# Altium PCB Protolink USB V1.PcbDoc
Units mil, origin at the board's own origin, x right, y up, seen from the top; angles counter-clockwise.
Board outline 1437.01 x 649.61 mil, 2 copper layers (Top Layer, Bottom Layer), stack 65.792 mil thick; 18 components, 19 nets, 72 pads, 2 vias.
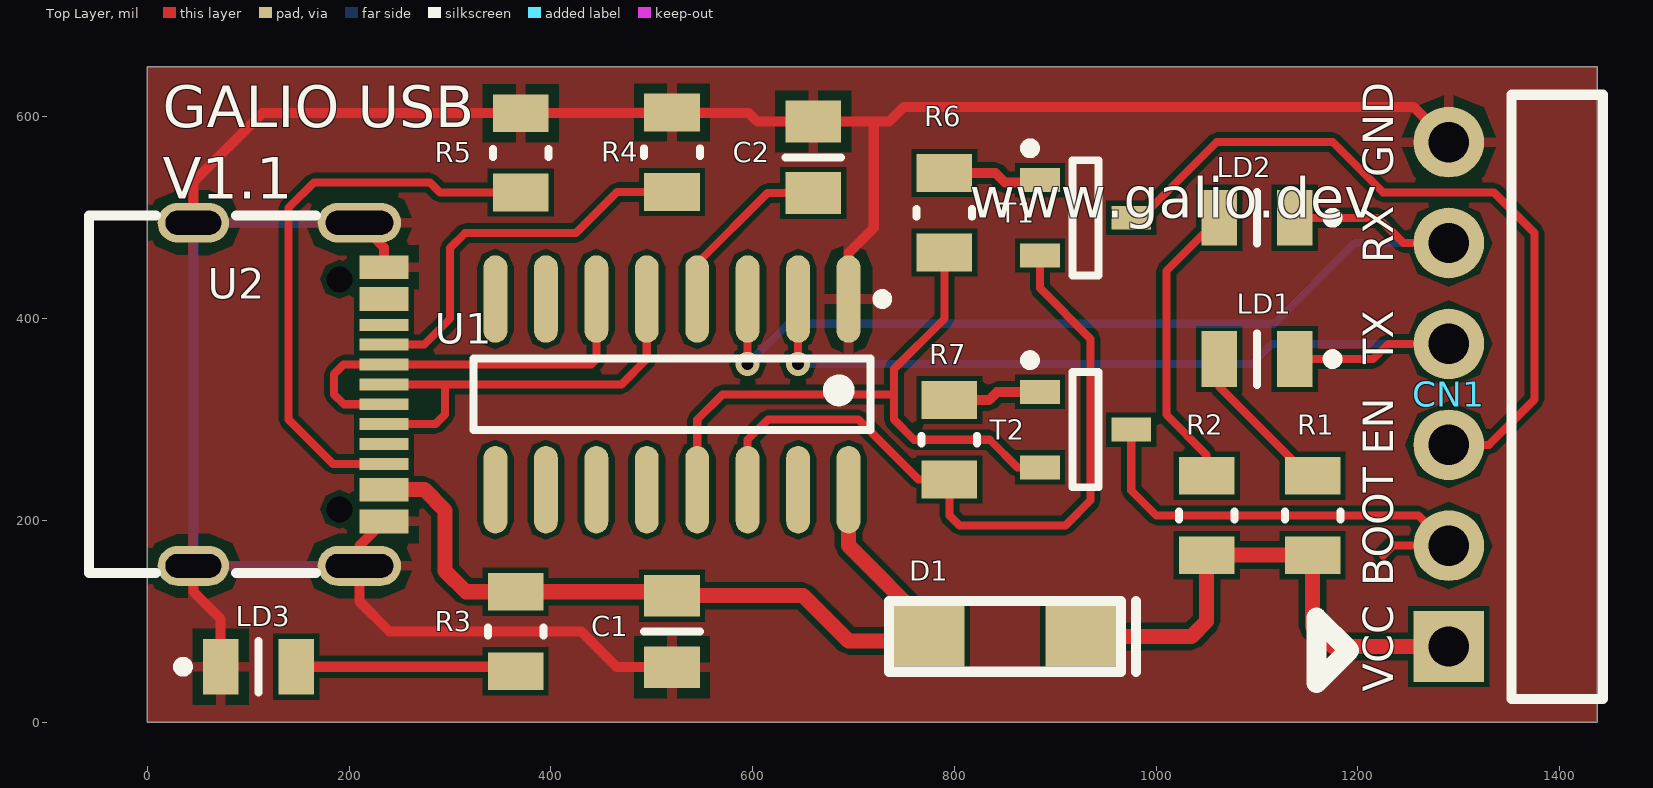
[diagram p0: Top Layer view]
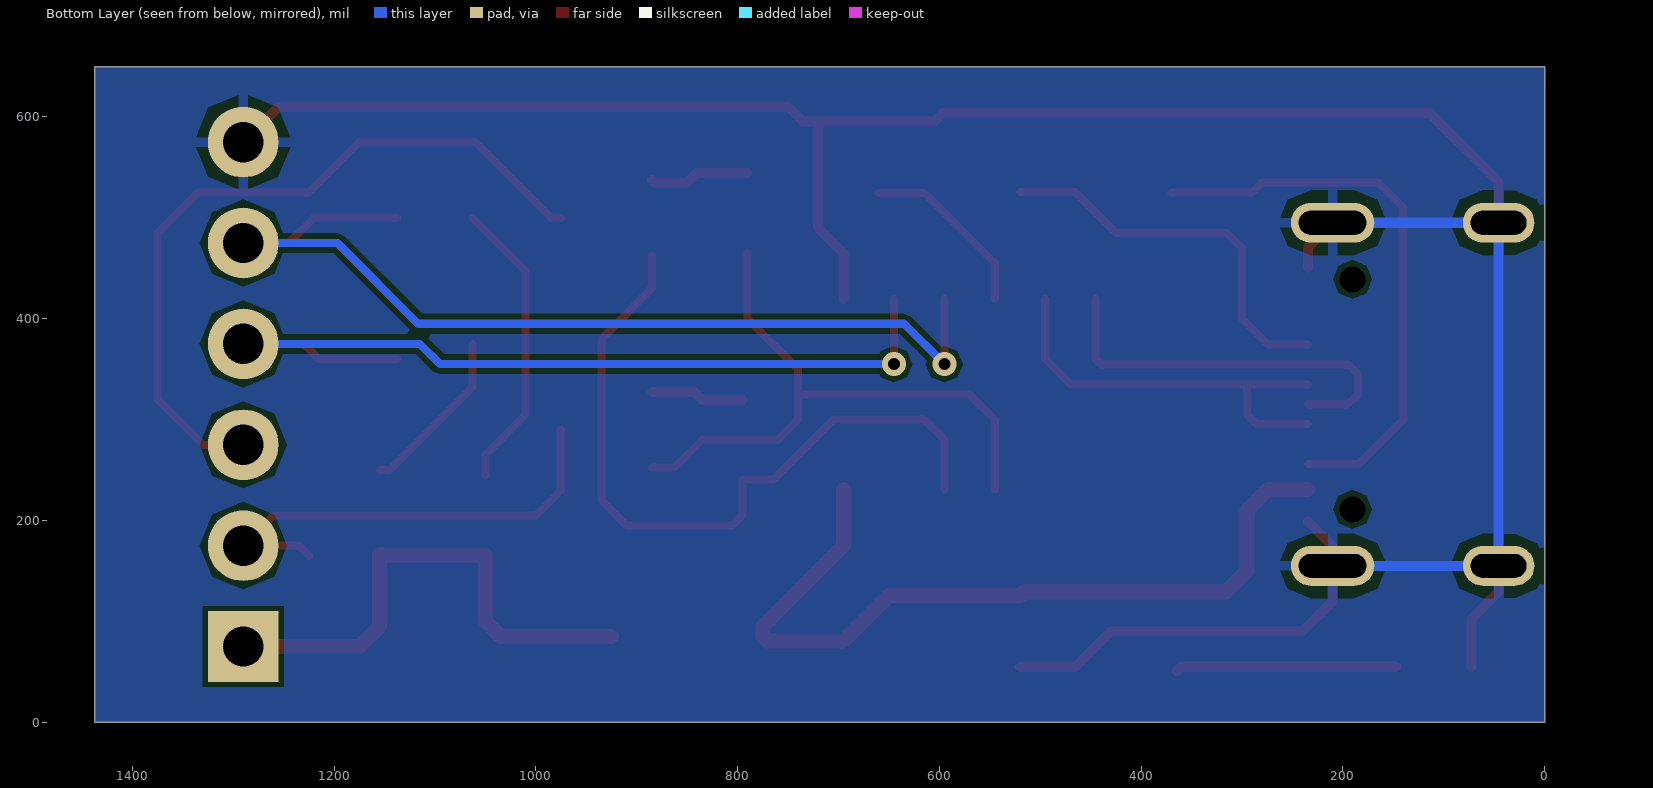
[diagram p1: Bottom Layer view, seen from below]
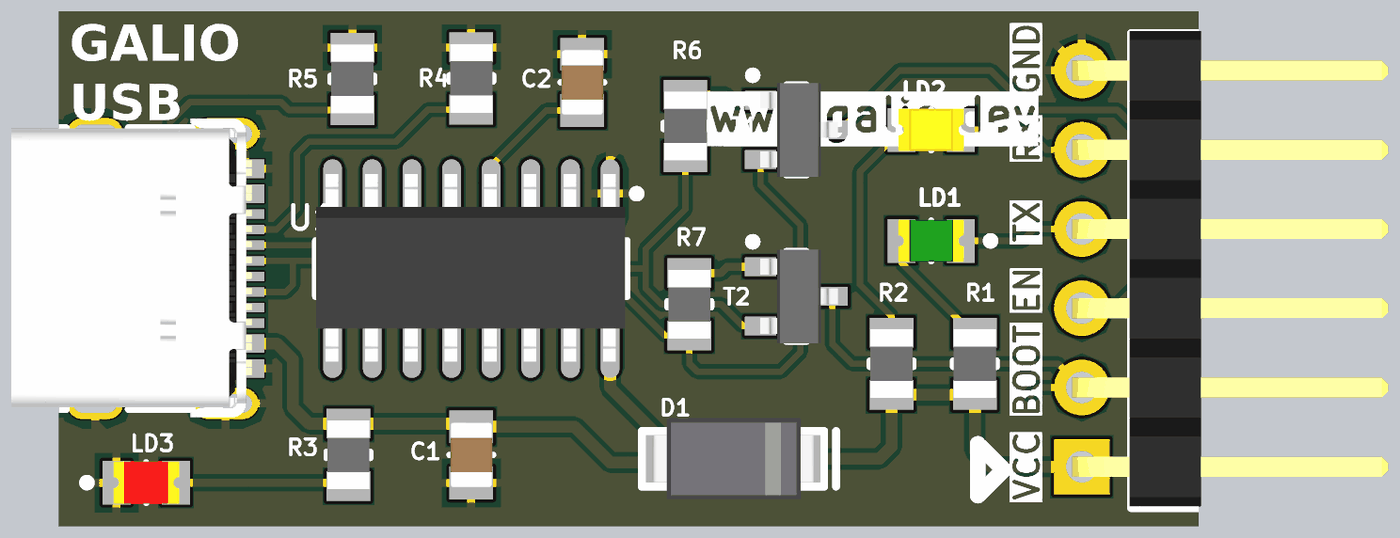
[diagram p2: 3D render of the assembled board from above, using the file's embedded part models]

## Layer stack, top to bottom
Top Solder: solder mask 0.4, Solder Resist, Dk 3.5
Top Layer: signal copper 1.4
Dielectric 1: dielectric 62.9921, FR-4, Dk 4.8
Bottom Layer: signal copper 1.4
Bottom Solder: solder mask 0.4, Solder Resist, Dk 3.5

## Board outline
0,0 0,649.61 1437.01,649.61 1437.01,0

## Design rules (kind name [scope] priority, off if disabled: settings)
Clearance [All] p1: gap=5 ignorepadtopadclearanceinfootprint=FALSE
PolygonConnect [All] p1: connectstyle=Relief reliefconductorwidth=10 reliefentries=4 polygonreliefangle="90 Angle" airgapwidth=10
RoutingVias [All] p1: holewidth=11.81 width=23.62 viastyle="Through Hole" minholewidth=11.81 minwidth=23.62 maxholewidth=11.81 maxwidth=23.62
SolderMaskExpansion [All] p1: expansion=4 istentingtop=FALSE
Width [All] p1: maxlimit=15 minlimit=7 preferedwidth=8 minimp=50.000000 maximp=50.000000 favimp=50.000000
30 further rules are at their usual default settings.

## Components (designator, comment, footprint, x,y, rotation, side; value= is the part's Value field where it differs from the comment)
C1 "100nF" CAPC2012X135N 520,90 r90 top
C2 "100nF" CAPC2012X135N 660,560 r270 top
CN1 "CON6" PIN6_RIGHT_ANGLE 1290,75 r180 top
D1 "DIODO" DIODE_SMA 775,85 r0 top
LD1 "Green" LED_OSRAM_LGR971 1100,360 r180 top
LD2 "Yellow" LED_OSRAM_LYR976 1100,500 r180 top
LD3 "Super Red" LED_OSRAM_LSR976 110,55 r0 top
R1 "1k" RESC2012X60N 1155,205 r90 top
R2 "1k" RESC2012X60N 1050,205 r90 top
R3 "1k" RESC2012X60N 365,90 r270 top
R4 "20k" RESC2012X60N 520,565 r270 top
R5 "20k" RESC2012X60N 370,564.37 r270 top
R6 "10k" RESC2012X60N 790,505 r90 top
R7 "10k" RESC2012X60N 795,280 r90 top
T1 "MMBT3904" SOT95P230X110-3N 930,500 r0 top
T2 "MMBT3904" SOT95P230X110-3N 930,290 r0 top
U1 "CH340C" SOIC-16_N 520,325 r270 top
U2 "GT-USB-7010ASV" USB-C-SMD_G-SWITCH_GT-USB-7010ASV 140,325 r270 top

## Footprints (in the part's own frame and the unit in brackets; to place one, negate y for a bottom-side part, rotate by r counter-clockwise, add the part's x,y. Pads: shape width x height; smd on the part's side, far side on the other; paste and mask are expansions set on the pad)
CAPC2012X135N [mm] "Chip Capacitor, Body 2.0x1.25mm, IPC Medium Density"
  rect 1.05x1.4 smd: 1(-0.9,0) 2(0.9,0)
  silkscreen extent 0,-0.7 0,0.7, body extent -1.05,-0.67 1.05,0.68, height 1.25
DIODE_SMA [mil]
  rect 70x60 smd: 1(150,0) 2(0,0)
  silkscreen extent -40,-35 205,35, body extent -26,-51 178,51, height 95
LED_OSRAM_LGR971 [mm] "Green Chip LED, 2-Leads, Body 2.0x1.25mm, IPC Medium Density"
  rect 0.9x1.4 smd: 1(-0.95,0) 2(0.95,0)
  silkscreen extent -2.02,-0.65 0,0.65, body extent -1.05,-0.67 1.05,0.68, height 0.9
LED_OSRAM_LSR976 [mm] "Super Red Chip LED, 2-Leads, Body 2.0x1.25mm, IPC Medium Density"
  rect 0.9x1.4 smd: 1(-0.95,0) 2(0.95,0)
  silkscreen extent -2.02,-0.65 0,0.65, body extent -1.05,-0.67 1.05,0.68, height 0.9
LED_OSRAM_LYR976 [mm] "Yellow Chip LED, 2-Leads, Body 2.0x1.25mm, IPC Medium Density"
  rect 0.9x1.4 smd: 1(-0.95,0) 2(0.95,0)
  silkscreen extent -2.02,-0.65 0,0.65, body extent -1.05,-0.67 1.05,0.68, height 0.9
PIN6_RIGHT_ANGLE [mil]
  rect 70x70 hole 40: 1(0,0)
  round 70 hole 40: 2(0,-100) 3(0,-200) 4(0,-300) 5(0,-400) 6(0,-500)
  silkscreen extent -153,-547 -62,52, body extent -386,-550 13,50, height 99
RESC2012X60N [mm] "Chip Resistor, EIA 0805, Metric 2012, Body 2.0x1.2mm, IPC Medium Density"
  rect 0.95x1.4 smd: 1(-1,0) 2(1,0)
  silkscreen extent -0.1,-0.7 0.1,0.7, body extent -1.1,-0.67 1.1,0.68, height 0.6
SOIC-16_N [mm] "SOIC, 16-Leads, Body 9.9x3.9mm, Pitch 1.27mm, IPC Medium Density"
  oval 2.2x0.6 smd: 1(-2.4,4.445) 2(-2.4,3.175) 3(-2.4,1.905) 4(-2.4,0.635) 5(-2.4,-0.635) 6(-2.4,-1.905) 7(-2.4,-3.175) 8(-2.4,-4.445) 9(2.4,-4.445) 10(2.4,-3.175) 11(2.4,-1.905) 12(2.4,-0.635) 13(2.4,0.635) 14(2.4,1.905) 15(2.4,3.175) 16(2.4,4.445)
  silkscreen extent -2.52,-5 0.9,5.42, body extent -3.03,-4.97 2.97,4.93, height 1.4
SOT95P230X110-3N [mm] "SOT23, 3 pin, Pitch 0.95mm - 1.3mm W X 2.9mm L X 1.1mm H, IPC Medium Density"
  rect 1x0.6 smd: 1(-1.15,0.95) 2(-1.15,-0.95) 3(1.15,0)
  silkscreen extent -1.52,-1.45 0.33,1.87, body extent -1.17,-1.5 1.33,1.5, height 1.1
USB-C-SMD_G-SWITCH_GT-USB-7010ASV [mm]
  oval 1x2.1 hole 0.6 slot 1.7 at 90 deg paste+0 mask+0.05: 1(-4.32,1.78) 2(4.32,1.78)
  oval 1x1.8 hole 0.6 slot 1.4 at 90 deg paste+0 mask+0.05: 3(4.32,-2.4) 4(-4.32,-2.4)
  rect 0.6x1.24 smd paste-100 mask+0.05: A1B12(-3.2,2.4) A4B9(-2.4,2.4) B1A12(3.2,2.4) B4A9(2.4,2.4)
  rect 0.3x1.24 smd paste-100 mask+0.05: A5(-1.25,2.4) A6(-0.25,2.4) A7(0.25,2.4) A8(1.25,2.4) B5(1.75,2.4) B6(0.75,2.4) B7(-0.75,2.4) B8(-1.75,2.4)
  round 0 hole 0.65: ""(-2.896,1.28) ""(2.896,1.28)
  silkscreen extent -4.5,-5.03 4.5,0.69, body extent -4.82,-5.09 4.76,2.62, height 3.25

## Part data
C1 C2: library part CC0805_100NF_50V_10%_X7R, "Non-polarised capacitor", Case=0805, Manufacturer=GENERIC, Manufacturer1 ComponentHeight=1.35mm, Manufacturer1 Example=EPCOS, Manufacturer1 Part Number=B37941K5104K62, Tolerance=±10%, Voltage=50V, Author="CERN DEM JLC", Component Type=Standard, CreateDate=03/12/2007, HelpURL=\\cern.ch\dfs\Applications\Altium\Datasheets\CC0805_X7R_EPCOS.pdf, LatestRevisionDate=03/12/2007, Manufacturer Part Number=CC0805_100NF_50V_10%_X7R, Mounted=Yes, Part Description="SMD Multilayer Chip Ceramic Capacitor", Part Number=CC0805_100NF_50V_10%_X7R, Pin Count=2, SMD=Yes, Socket=No, Status=Preferred, Table="Capacitors SMD", TC=X7R
LD1: library part LED_OSRAM_LGR971, "LED Green 1C 2A", Case=0805, Manufacturer=OSRAM, Manufacturer Part Number=LGR971, Author="CERN DEM JLC", Color=Green, ComponentHeight=0.9mm, Component Type=Standard, CreateDate=28/01/2009, HelpURL=\\cern.ch\dfs\Applications\Altium\Datasheets\LED_OSRAM_LGR971.pdf, LatestRevisionDate=17/03/2010, Mounted=Yes, PackageDescription="Green Chip LED, 2-Leads, Body 2.0x1.25mm, IPC Medium Density", Part Description="Surface Mount Green LED (0805 Case)", Part Number=LED_OSRAM_LGR971, Pin Count=2, SMD=Yes, Socket=No, Table="LEDs & Displays"
LD2: library part LED_OSRAM_LYR976, "LED Yellow 1C 2A", Case=0805, Manufacturer=OSRAM, Manufacturer Part Number=LYR976, Author="CERN DEM JLC", Color=Yellow, ComponentHeight=0.9mm, Component Type=Standard, CreateDate=18/05/2010, HelpURL=\\cern.ch\dfs\Applications\Altium\Datasheets\LED_OSRAM_LYR976.pdf, LatestRevisionDate=18/05/2010, Mounted=Yes, PackageDescription="Yellow Chip LED, 2-Leads, Body 2 x1.25mm, IPC Medium Density", Part Description="Surface Mount Yellow LED (0805 Case)", Part Number=LED_OSRAM_LYR976, Pin Count=2, SMD=Yes, Socket=No, Table="LEDs & Displays"
LD3: library part LED_OSRAM_LSR976, "LED Red 1C 2A", Case=0805, Manufacturer=OSRAM, Manufacturer Part Number=LSR976, Author="CERN DEM JLC", Color="Super Red", ComponentHeight=0.9mm, Component Type=Standard, CreateDate=18/05/2010, HelpURL=\\cern.ch\dfs\Applications\Altium\Datasheets\LED_OSRAM_LSR976.pdf, LatestRevisionDate=18/05/2010, Mounted=Yes, PackageDescription="Super Red Chip LED, 2-Leads, Body 2 x1.25mm, IPC Medium Density", Part Description="Surface Mount Super Red LED (0805 Case)", Part Number=LED_OSRAM_LSR976, Pin Count=2, SMD=Yes, Socket=No, Table="LEDs & Displays"
R1 R2 R3: library part R0805_1K0_0.1%_0.1W_10PPM, "Resistor - 0.1%", Case=0805, Manufacturer=GENERIC, Manufacturer1 ComponentHeight=0.6mm, Manufacturer1 Example="TYCO HOLSWORTHY", Manufacturer1 Part Number=RN73C2A1K0BTG, Power=0.1W, Tolerance=±0.1%, Author="CERN DEM JLC", Component Type=Standard, CreateDate=03/12/2007, HelpURL=\\cern.ch\dfs\Applications\Altium\Datasheets\R0805_Tyco_RN73.pdf, LatestRevisionDate=13/03/2008, Manufacturer Part Number=R0805_1K0_0.1%_0.1W_10PPM, Mounted=Yes, Part Description="Thin Film Chip Resistor", Part Number=R0805_1K0_0.1%_0.1W_10PPM, Pin Count=2, SMD=Yes, Socket=No, Status="Not recommended", Table="Resistors SMD", TC=±10ppm
R4 R5: library part R0805_20K_0.1%_0.1W_10PPM, "Resistor - 0.1%", Case=0805, Manufacturer=GENERIC, Manufacturer1 ComponentHeight=0.6mm, Manufacturer1 Example="TYCO HOLSWORTHY", Manufacturer1 Part Number=RN73C2A20KBTG, Power=0.1W, Tolerance=±0.1%, Author="CERN DEM JLC", Component Type=Standard, CreateDate=03/12/2007, HelpURL=\\cern.ch\dfs\Applications\Altium\Datasheets\R0805_Tyco_RN73.pdf, LatestRevisionDate=13/03/2008, Manufacturer Part Number=R0805_20K_0.1%_0.1W_10PPM, Mounted=Yes, Part Description="Thin Film Chip Resistor", Part Number=R0805_20K_0.1%_0.1W_10PPM, Pin Count=2, SMD=Yes, Socket=No, Status="Not recommended", Table="Resistors SMD", TC=±10ppm
R6 R7: library part R0805_10K_1%_0.125W_100PPM, "Resistor - 1%", Case=0805, Manufacturer=GENERIC, Manufacturer1 ComponentHeight=0.6mm, Manufacturer1 Example="NIC COMPONENT", Manufacturer1 Part Number=NRC10F1002TRF, Power=0.125W, Tolerance=±1%, Author="CERN DEM JLC", Component Type=Standard, CreateDate=03/12/2007, HelpURL=\\cern.ch\dfs\Applications\Altium\Datasheets\R0805_NIC_NRC.pdf, LatestRevisionDate=13/03/2008, Manufacturer Part Number=R0805_10K_1%_0.125W_100PPM, Mounted=Yes, Part Description="General Purpose Thick Film Chip Resistor", Part Number=R0805_10K_1%_0.125W_100PPM, Pin Count=2, SMD=Yes, Socket=No, Status=Preferred, Table="Resistors SMD", TC=±100ppm/°C
T1 T2: "NPN Transistor", Case=SOT23-3, Manufacturer="NXP SEMICONDUCTORS", Author="CERN DEM JLC", ComponentHeight=1.1mm, Component Type=Standard, CreateDate=10/02/2010, Device=MMBT3904, HelpURL=\\cern.ch\dfs\Applications\Altium\Datasheets\MMBT3904.pdf, LatestRevisionDate=10/02/2010, Manufacturer Part Number=MMBT3904, Mounted=Yes, PackageDescription="SOT23, 3 pin, Pitch 0.95mm - 1.3mm W X 2.9mm L X 1.1mm H, IPC Medium Density", Part Description="40V 200mA NPN Switching Transistor", Part Number=MMBT3904, Pin Count=3, SMD=Yes, Socket=No, Table=Transistors
U2: Core Colour=Black, Current Rating - Power (Max)=3A, JLCPCB Part Class="Extended Part", LCSC Part Name="Type-C ? ??", Manufacturer=G-Switch(??), Operating Temperature Range=-40?~+85?, Rated Voltage (Max)=24V, Add into BOM=yes, Center Height=1.68mm, Connect-Disconnect Life="10,000 times", Connector Type=Type-C, Convert to PCB=yes, Datasheet=https://atta.szlcsc.com/upload/public/pdf/source/20230327/DF227B64686AC8FA0AD1775797F2C3F1.pdf, Device=GT-USB-7010ASV, Gender=Female, Length=7.35mm, Manufacturer Part=GT-USB-7010ASV, Mounting Style="Horizontal attachment", Number of Contacts=16P, Number of Ports=1, Standard="USB 2.0", Supplier=LCSC, Supplier Footprint=SMD, Supplier Part=C2988369, Symbol=GT-USB-7010ASV

## Via types
v1: diameter 23.62, hole 11.81, Top Layer to Bottom Layer, 2 vias

## Nets (pads, with @x,y where several pads share a name; then routed paths per layer and width w, separated by ;. In a path a pad name is that pad's centre, name@x,y a point inside that pad or via, vN(x,y) a via of type N, cw(c..) or ccw(c..) an arc to the next point about the centre after c; other vN are vias at no path point)
5V: CN1.1 D1.1 R1.1 R2.1 | length 515.8
  Top Layer w15: D1.1 1035,85 1050,100 R2.1 R1.1 1155,95 1175,75 CN1.1
BOOT: CN1.2 T2.3 | length 466.8
  Top Layer w8: T2.3 975.28,229.72 1000,205 1260,205 CN1.2 1235,175 1225,165
D_N: U1.6 U2.A7 U2.B7 | length 399.3
  Top Layer w8: U2.A7 194.84,315.16 185,325 185,345 194.53,354.53 U2.B7 439.53,354.53 445,360 U1.6
D_P: U1.5 U2.A6 U2.B6 | length 424.7
  Top Layer w8: U2.B6 285.47,295.47 295,305 295,334.84 ; U2.A6 295,334.84 ; U1.5 495,360 469.84,334.84 295,334.84
DTR: R6.1 T2.2 U1.13 | length 625.5
  Top Layer w8: U1.13 545,300 570,325 740,325 ; R6.1 790,400 740,350 740,325 ; T2.2 862.4,252.6 835,280 760,280 740,300 740,325
GND: C1.1 C2.1 CN1.6 LD3.1 R4.1 R5.1 U1.1 U2.1 U2.2 U2.3 U2.4 U2.A1B12 U2.B1A12 | length 2784.3
  Top Layer w10: U2.3 45.51,129.49 72.6,102.4 LD3.1 ; U2.4 45.51,535.51 113.74,603.74 R5.1 596.26,603.74 604.57,595.43 C2.1 720,595.43 ; U2.1 234.49,470.67 U2.A1B12 ; U2.B1A12 210.08,174.61 U2.2 210.08,119.92 240,90 430,90 465.43,54.57 C1.1 ; U1.1 695,465 720,490 720,595.43 ; CN1.6 1255,610 750,610 735.43,595.43 720,595.43
  Bottom Layer w10: U2.2 U2.3 U2.4 U2.1
NetC2_2: C2.2 U1.4 | length 179.3
  Top Layer w8: U1.4 545,455 614.57,524.57 C2.2
NetLD1_2: LD1.2 R1.2 | length 169.1
  Top Layer w8: LD1.2@1062.6,375 LD1.2 1062.6,332.4 1145,250 R1.2@1155,250
NetLD2_2: LD2.2 R2.2 | length 294
  Top Layer w8: R2.2 1050,265 1010,305 1010,447.4 LD2.2
NetLD3_2: LD3.2 R3.2 | length 219.4
  Top Layer w10: LD3.2 360.63,55 R3.2
NetR4_2: R4.2 U2.A5 | length 389.2
  Top Layer w8: U2.A5 274.21,374.21 300,400 300,470 315,485 425,485 465.63,525.63 R4.2
NetR5_2: R5.2 U2.B5 | length 567.2
  Top Layer w8: U2.B5 183.9,256.1 140,300 140,510 165,535 280,535 290,525 R5.2
NetR6_2: R6.2 T1.1 | length 99.6
  Top Layer w10: R6.2 840.63,544.37 850,535 882.32,535 T1.1
NetR7_2: R7.2 T2.1 | length 93.1
  Top Layer w10: R7.2 834.37,319.37 842.4,327.4 T2.1
RESET: CN1.3 T1.3 | length 736.7
  Top Layer w8: T1.3 985,500 1060,575 1175,575 1225,525 1335,525 1375,485 1375,320 1330,275 CN1.3
RTS: R7.1 T1.2 U1.14 | length 735.9
  Top Layer w8: U1.14 595,280 615,300 705,300 764.37,240.63 R7.1 795,205 805,195 910,195 935,220 935,380 884.72,430.28 T1.2
RXD: CN1.5 LD2.1 U1.3 | length 972.1
  Top Layer w8: v1(595,355) U1.3 ; LD2.1 1220,500 1245,475 CN1.5
  Bottom Layer w8: v1(595,355) 635,395 1116.62,395 1196.62,475 CN1.5
TXD: CN1.4 LD1.1 U1.2 | length 876.6
  Top Layer w8: v1(645,355) U1.2 ; LD1.1 1215,360 1230,375 CN1.4
  Bottom Layer w8: v1(645,355) 1095,355 1115,375 CN1.4
VUSB: C1.2 D1.2 R3.1 U1.16 U2.B4A9 | length 818.4
  Top Layer w15: U2.B4A9 274.49,230.51 295,210 295,150 315.63,129.37 R3.1 516.06,129.37 C1.2 650,125.43 695,80.43 770.43,80.43 D1.2 775,95 695,175 U1.16
pads on no net: U1.7 U1.8 U1.9 U1.10 U1.11 U1.12 U1.15 U2. U2.A4B9 U2.A8 U2.B8

## Polygon pours and split planes (outlines as drawn)
GND on Top Layer "TOP GND" (solid, pour order 3): 0,0 1437.01,0 1437.01,649.61 0,649.61
GND on Bottom Layer "BOTOM_GND" (solid, remove dead copper, pour order 5): 0,0 1437.01,0 1437.01,649.61 0,649.61

## Silkscreen, mask and mechanical layers (free items; w line width, h text height)
Top Overlay:
  lines w20: 1158.75,38.75 1191.25,71.25 1158.75,103.75 1158.75,38.75
  text "GND" at 1235,540 h30 r90
  text "GALIO USB / V1.1" at 15,505 h70.87
  text "www.galio.dev" at 815,500 h40
  text "RX" at 1235,455 h30 r90
  text "TX" at 1235,355 h30 r90
  text "EN" at 1235,265 h30 r90
  text "BOOT" at 1235,135 h30 r90
  text "VCC" at 1235,30 h30 r90
Mechanical 1:
  the board outline again, w10

## Dimensions
0,0 to 0,649.61 on Mechanical 15
0,0 to 1437.01,0 on Mechanical 15